# Altium PCB EV76C661_Motherboard.PcbDoc
Units mm, origin at the board's own origin, x right, y up, seen from the top; angles counter-clockwise.
Board outline 89 x 93 mm, 2 copper layers (Top Layer, Bottom Layer); 17 components, 26 nets, 152 pads, 0 vias.
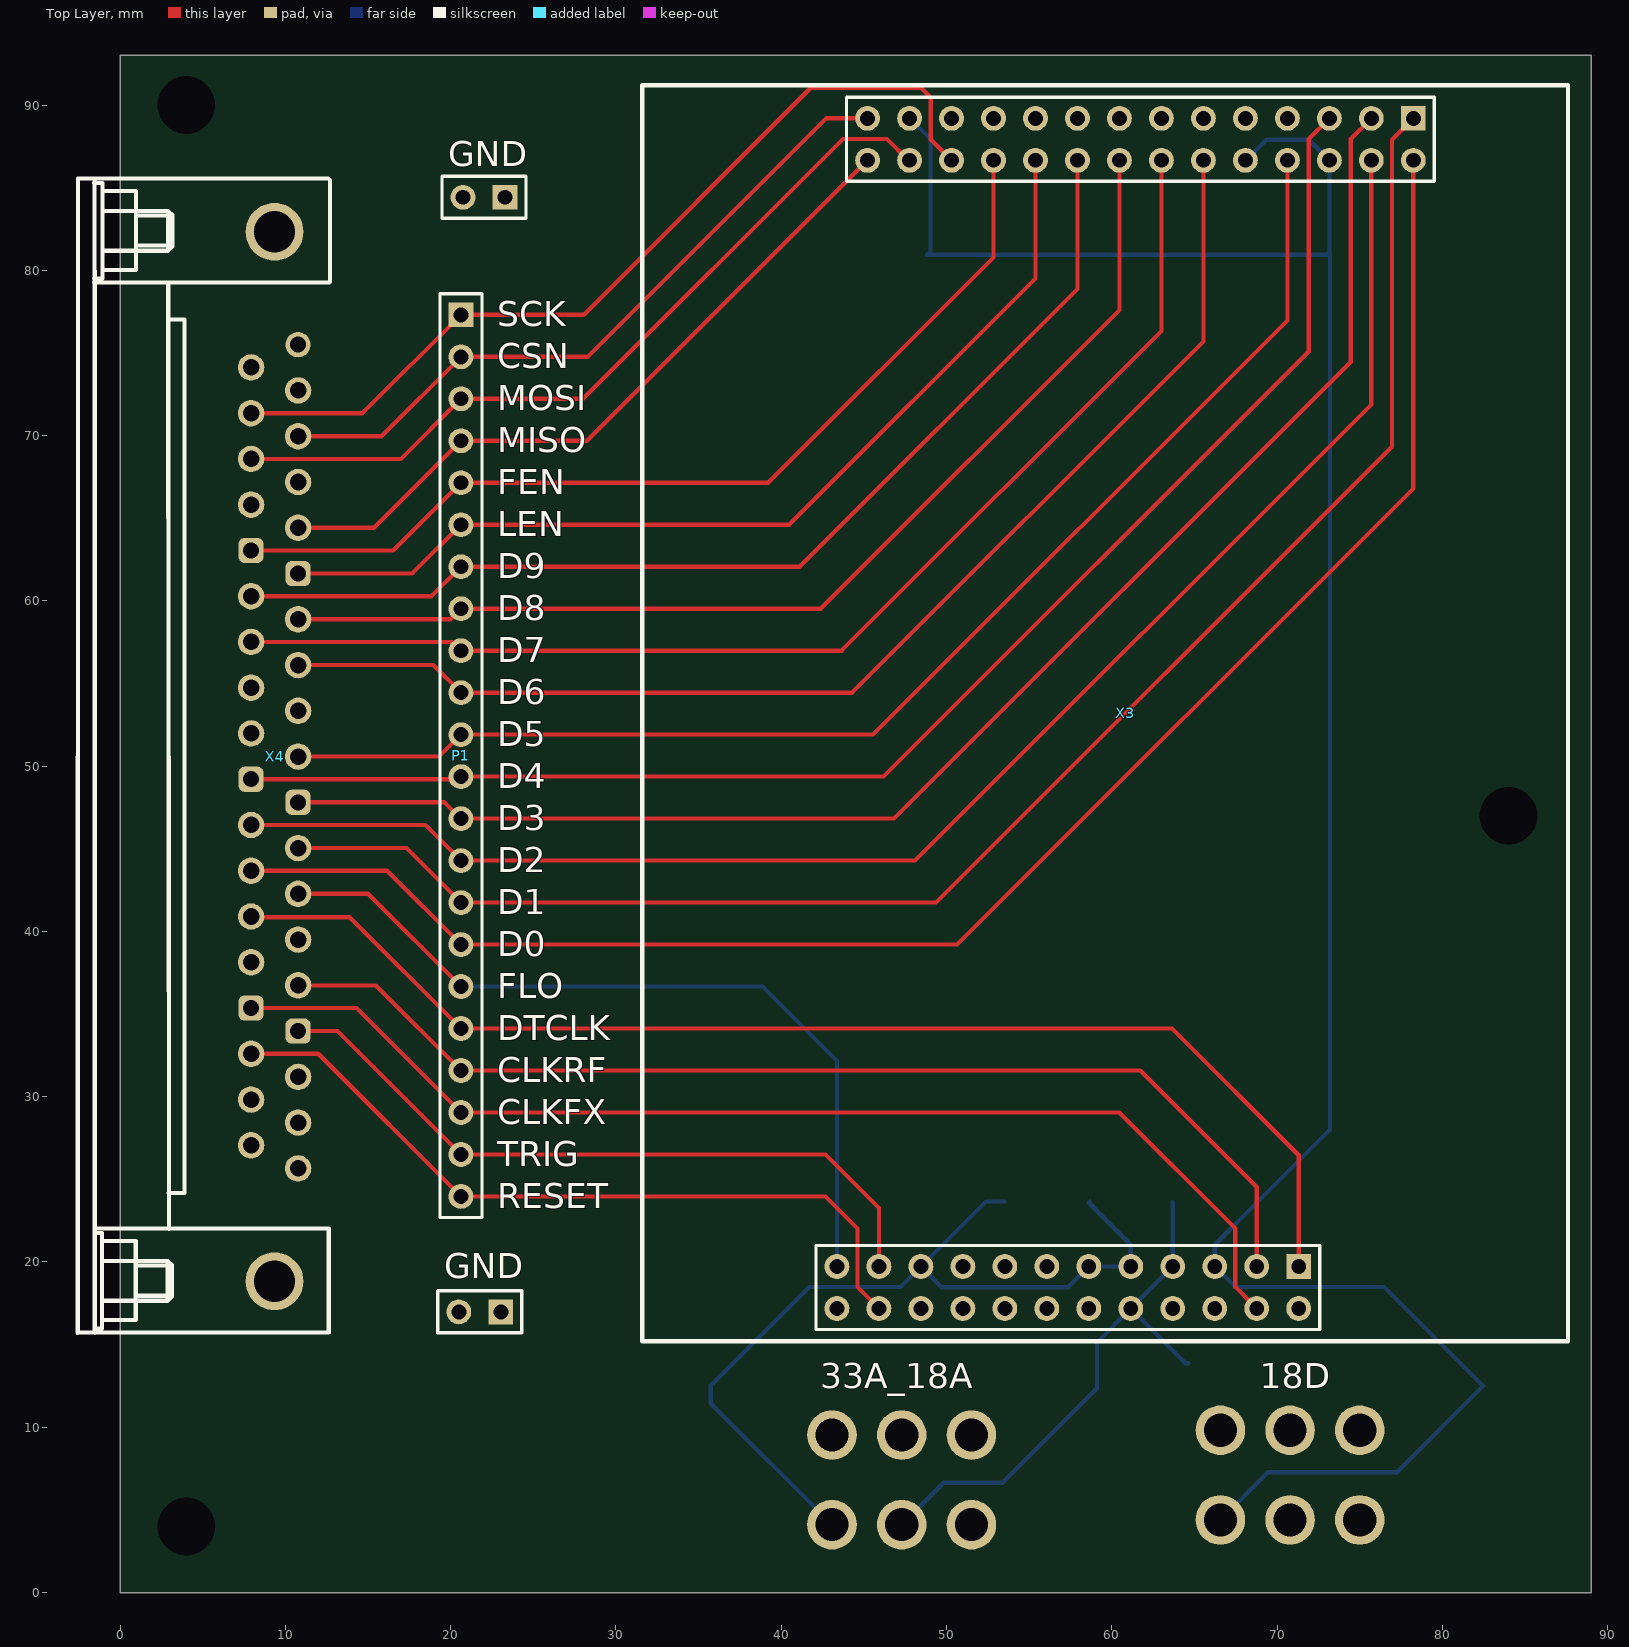
[diagram p0: Top Layer view]
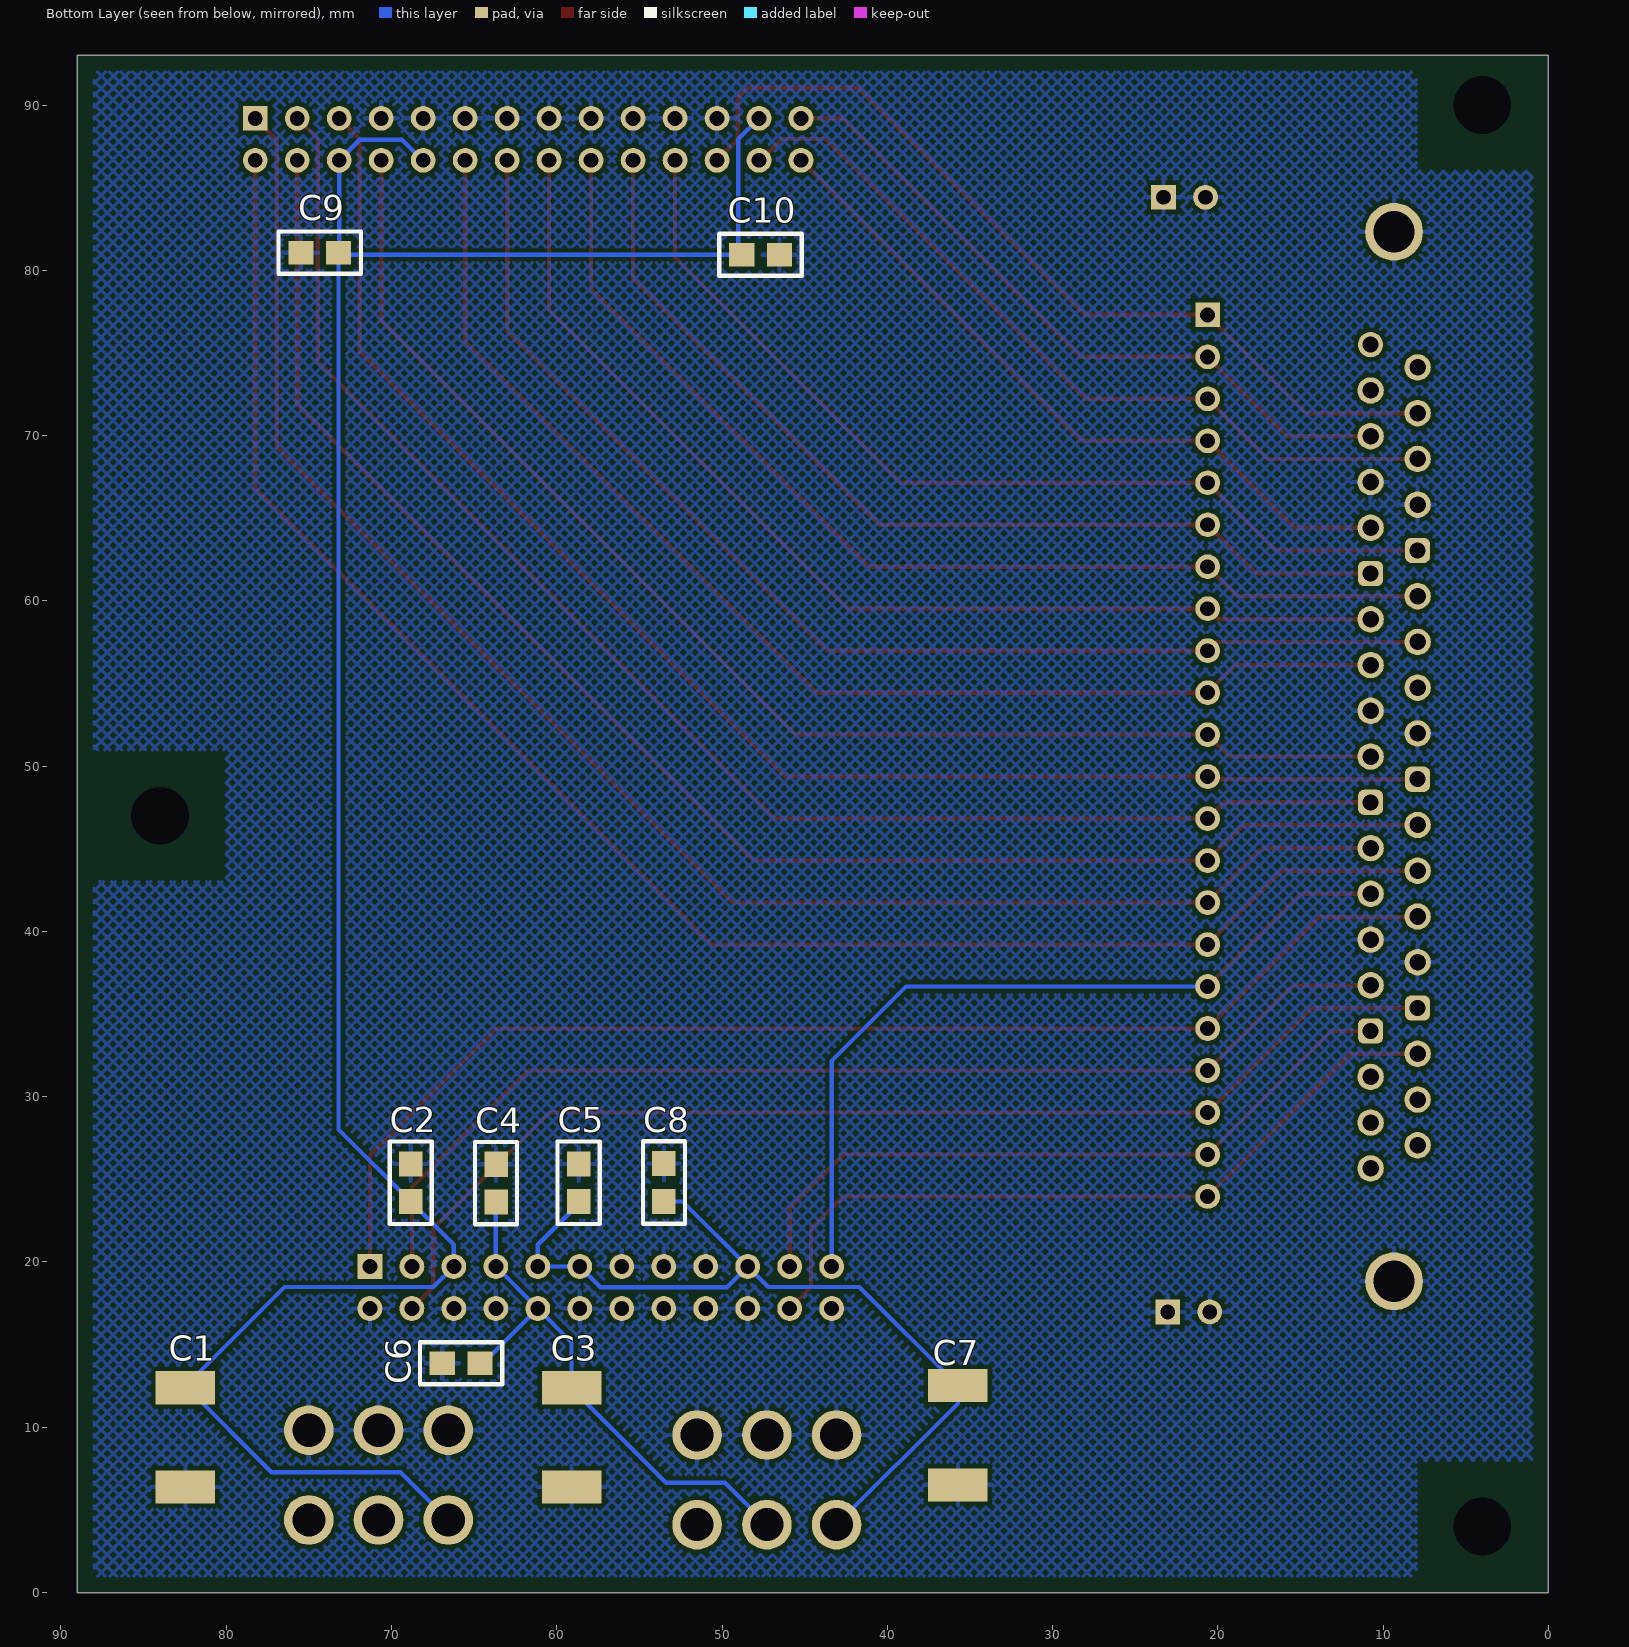
[diagram p1: Bottom Layer view, seen from below]

## Layer stack, top to bottom
Top Solder: solder mask 0.0102, Solder Resist, Dk 3.5
Top Layer: signal copper 0.0356
Dielectric 1: dielectric 0.32, FR-4, Dk 4.8
Bottom Layer: signal copper 0.0356
Bottom Solder: solder mask 0.0102, Solder Resist, Dk 3.5

## Board outline
0,0 89,0 89,93 0,93
cut-out: 89.199,93.006
cut-out: 89.199,93.006

## Design rules (kind name [scope] priority, off if disabled: settings)
Clearance [All] p1: gap=0.254 ignorepadtopadclearanceinfootprint=FALSE except(0: Arc-Hole Track-Hole SMDPad-Hole THPad-Hole Via-Hole Fill-Hole Poly-Hole Region-Hole Text-Hole)
PolygonConnect [All] p1: connectstyle=Relief reliefconductorwidth=0.254 reliefentries=4 polygonreliefangle="90 Angle" airgapwidth=0.254
RoutingVias [All] p1: holewidth=0.711 width=1.27 viastyle="Through Hole" minholewidth=0.711 minwidth=1.27 maxholewidth=0.711 maxwidth=1.27
SolderMaskExpansion [All] p1: expansion=0.102
Width [All] p1: maxlimit=0.254 minlimit=0.125 preferedwidth=0.254
30 further rules are at their usual default settings.

## Components (designator, comment, footprint, x,y, rotation, side; value= is the part's Value field where it differs from the comment)
18D "POWER" POWER 70.784,12.019 r180 top (schematic designator X2)
33A_18A "POWER" POWER 47.289,11.726 r180 top (schematic designator X1)
C1 "10uF" Cap_BIG 80.563,13.484 r0 bottom
C2 "100nF" CAP_SMALL 67.564,22.287 r90 bottom
C3 "10uF" Cap_BIG 57.195,13.484 r0 bottom
C4 "100nF" CAP_SMALL 62.402,22.267 r90 bottom
C5 "100nF" CAP_SMALL 59.944,27.301 r270 bottom
C6 "100nF" CAP_SMALL 63.279,15.142 r0 bottom
C7 "10uF" Cap_BIG 33.827,13.611 r0 bottom
C8 "100nF" CAP_SMALL 52.242,22.3 r90 bottom
C9 "100nF" CAP_SMALL 76.847,79.798 r180 bottom
C10 "100nF" CAP_SMALL 45.163,82.211 r0 bottom
GND "Header 2" HDR1X2 23.032,16.981 r180 top (schematic designator P2)
GND "Header 2" HDR1X2 23.286,84.418 r180 top (schematic designator P3)
P1 "Header 22" HDR1X22 20.619,77.306 r270 top
X3 "EV76_MEZ" EV76C661_MEZONINE 71.307,17.187 r90 top
X4 "CHEAP_CON_37_FEMALE" CHEAP_CONN_FEMALE 9.341,18.831 r90 top

## Footprints (in the part's own frame and the unit in brackets; to place one, negate y for a bottom-side part, rotate by r counter-clockwise, add the part's x,y. Pads: shape width x height; smd on the part's side, far side on the other; paste and mask are expansions set on the pad)
Cap_BIG [mm] "FROM_MAX"
  rect 3.6x2 smd: 1(1.905,7.092) 2(1.905,1.092)
  body extent 0,-0.01 3.81,8.19, height 2.54
CAP_SMALL [mil] "FROM_MAX"
  rect 60x55.98 smd: 1(53.71,50) 2(143.71,50)
  silkscreen extent 1,0 197,100, body extent 20,18 178,82, height 100
CHEAP_CONN_FEMALE [mm] "CHEAP_CONN_FEMALE"
  round 1.6 hole 1: 1(6.833,-1.422) 2(9.601,-1.422) 3(12.37,-1.422) 5(17.907,-1.422) 6(20.676,-1.422) 7(23.444,-1.422) 8(26.213,-1.422) 10(31.75,-1.422) 11(34.519,-1.422) 12(37.287,-1.422) 13(40.056,-1.422) 15(45.593,-1.422) 16(48.362,-1.422) 17(51.13,-1.422) 18(53.899,-1.422) 20(8.23,1.422) 21(10.998,1.422) 22(13.767,1.422) 24(19.304,1.422) 25(22.073,1.422) 26(24.841,1.422) 27(27.61,1.422) 29(33.147,1.422) 30(35.916,1.422) 31(38.684,1.422) 32(41.453,1.422) 34(46.99,1.422) 35(49.759,1.422) 36(52.527,1.422) 37(55.296,1.422)
  rrect50% 1.524x1.524 hole 0.965: 4(15.138,-1.422) 9(28.981,-1.422) 14(42.824,-1.422) 23(16.535,1.422) 28(30.378,1.422) 33(44.221,1.422)
  round 1.524 hole 0.965: 19(56.667,-1.422)
  round 3.5 hole 2.5: 38(0,0) 39(63.5,0)
  silkscreen extent -3.11,-3.36 66.72,11.92
EV76C661_MEZONINE [mm]
  rect 1.5x1.5 hole 0.9: 1(2.54,0) 25(72.009,-6.934)
  round 1.5 hole 0.9: 2(0,0) 3(2.54,2.54) 4(0,2.54) 5(2.54,5.08) 6(0,5.08) 7(2.54,7.62) 8(0,7.62) 9(2.54,10.16) 10(0,10.16) 11(2.54,12.7) 12(0,12.7) 13(2.54,15.24) 14(0,15.24) 15(2.54,17.78) 16(0,17.78) 17(2.54,20.32) 18(0,20.32) 19(2.54,22.86) 20(0,22.86) 21(2.54,25.4) 22(0,25.4) 23(2.54,27.94) 24(0,27.94) 26(72.009,-4.394) 27(72.009,-1.854) 28(72.009,0.686) 29(72.009,3.226) 30(72.009,5.766) 31(72.009,8.306) 32(72.009,10.846) 33(72.009,13.386) 34(72.009,15.926) 35(72.009,18.466) 36(72.009,21.006) 37(72.009,23.546) 38(72.009,26.086) 39(69.469,-6.934) 40(69.469,-4.394) 41(69.469,-1.854) 42(69.469,0.686) 43(69.469,3.226) 44(69.469,5.766) 45(69.469,8.306) 46(69.469,10.846) 47(69.469,13.386) 48(69.469,15.926) 49(69.469,18.466) 50(69.469,21.006) 51(69.469,23.546) 52(69.469,26.086)
  silkscreen extent -1.99,-16.28 74.01,39.72
HDR1X2 [mm] "Connector; Header; 2 Position"
  rect 1.5x1.5 hole 0.9: 1(0,0)
  round 1.5 hole 0.9: 2(2.54,0)
  silkscreen extent -1.27,-1.27 3.81,1.27
HDR1X22 [mm] "Connector; Header; 22 Position"
  rect 1.5x1.5 hole 0.9: 1(0,0)
  round 1.5 hole 0.9: 2(2.54,0) 3(5.08,0) 4(7.62,0) 5(10.16,0) 6(12.7,0) 7(15.24,0) 8(17.78,0) 9(20.32,0) 10(22.86,0) 11(25.4,0) 12(27.94,0) 13(30.48,0) 14(33.02,0) 15(35.56,0) 16(38.1,0) 17(40.64,0) 18(43.18,0) 19(45.72,0) 20(48.26,0) 21(50.8,0) 22(53.34,0)
  silkscreen extent -1.27,-1.27 54.61,1.27
POWER [mm] "POWER"
  round 3 hole 2: 1(4.217,7.62) 2(0,7.62) 3(-4.217,7.62) 4(4.217,2.198) 5(0,2.198) 6(-4.217,2.198)

## Part data
C1 C3 C7: library part CAP_BIG
C2 C4 C5 C6 C8 C9 C10: library part CAP_SMALL
GND GND: "Header, 2-Pin", LatestRevisionDate=17-Jul-2002, LatestRevisionNote="Re-released for DXP Platform.", Publisher="Altium Limited"
P1: "Header, 22-Pin", LatestRevisionDate=17-Jul-2002, LatestRevisionNote="Re-released for DXP Platform.", Publisher="Altium Limited"
X3: library part EV76C661_MEZ

## Free pads (board coordinates)
  round 1.524 hole 3.5 unplated: 0(4,4) 0(4,90) 0(84,47)

## Nets (pads, with @x,y where several pads share a name; then routed paths per layer and width w, separated by ;. In a path a pad name is that pad's centre, name@x,y a point inside that pad or via, vN(x,y) a via of type N, cw(c..) or ccw(c..) an arc to the next point about the centre after c; other vN are vias at no path point)
CLKFIX: P1.20 X3.4 X4.23 | length 70.5
  Top Layer w0.254: X4.23 14.299,35.366 P1.20 60.449,29.046 67.472,22.023 67.472,18.482 X3.4
CLKREF: P1.19 X3.3 X4.5 | length 67.9
  Top Layer w0.254: X4.5 15.467,36.738 P1.19 61.719,31.586 68.767,24.538 X3.3
CSN: P1.2 X3.38 X4.17 | length 42.4
  Top Layer w0.254: X4.17 15.814,69.961 P1.2 28.287,74.766 42.717,89.196 X3.38
D0: P1.16 X3.39 X4.26 | length 103.5
  Top Layer w0.254: X4.26 16.153,43.672 P1.16 50.639,39.206 78.242,66.809 X3.39
D1: P1.15 X3.25 X4.8 | length 99.4
  Top Layer w0.254: X4.8 17.322,45.043 P1.15 49.369,41.746 76.946,69.323 76.946,87.901 X3.25
D2: P1.14 X3.40 X4.27 | length 94.9
  Top Layer w0.254: X4.27 18.465,46.44 P1.14 48.099,44.286 75.702,71.889 X3.40
D3: P1.13 X3.26 X4.9 | length 90.8
  Top Layer w0.254: X4.9 19.633,47.812 P1.13 46.829,46.826 74.457,74.454 74.457,87.951 X3.26
D4: P1.12 X3.27 X4.28 | length 89.6
  Top Layer w0.254: X4.28@8.076,49.366 X4.28 20.462,49.209 P1.12 46.194,49.366 71.917,75.089 71.917,87.951 X3.27
D5: P1.11 X3.42 X4.10 | length 80.5
  Top Layer w0.254: X4.10 19.294,50.581 P1.11 45.559,51.906 70.622,76.969 X3.42
D6: P1.10 X3.44 X4.12 | length 75.2
  Top Layer w0.254: X4.12 18.947,56.118 P1.10 44.289,54.446 65.542,75.699 X3.44
D7: P1.9 X3.45 X4.31 | length 73.6
  Top Layer w0.254: X4.31 20.09,57.515 P1.9 43.654,56.986 63.002,76.334 X3.45
D8: P1.8 X3.46 X4.13 | length 66.5
  Top Layer w0.254: X4.13 19.979,58.886 P1.8 42.384,59.526 60.462,77.604 X3.46
D9: P1.7 X3.47 X4.32 | length 65.5
  Top Layer w0.254: X4.32 18.836,60.283 P1.7 41.114,62.066 57.922,78.874 X3.47
DATACLK: P1.18 X3.1 X4.25 | length 76.1
  Top Layer w0.254: X4.25 7.965,40.857 13.888,40.857 P1.18 63.639,34.126 71.307,26.458 X3.1
FEN: P1.5 X3.49 X4.33 | length 58.1
  Top Layer w0.254: X4.33 16.525,63.052 P1.5 39.209,67.146 52.842,80.779 X3.49
FLO: P1.17 X3.23 X4.7 | length 49.2
  Top Layer w0.254: X4.7 15.01,42.275 P1.17
  Bottom Layer w0.254: P1.17 38.859,36.666 43.367,32.158 X3.23
GND: 18D.4 18D.5 18D.6 33A_18A.4 33A_18A.5 33A_18A.6 C1.1 C2.2 C3.1 C4.2 C5.1 C6.2 C7.1 C8.2 C9.1 C10.1 GND.1 GND.2 X3.2 X3.6 X3.8 X3.12 X3.13 X3.14 X3.15 X3.16 X3.17 X3.18 X3.20 X3.24 X3.28 X3.29 X3.30 X3.31 X3.32 X3.33 X3.34 X3.35 X3.36 X4.6 X4.11 X4.16 X4.24 X4.29 X4.34 X4.38 X4.39 | length 0
  Bottom Layer w0.254: C4.2@63.639,25.95 C4.2
LEN: P1.6 X3.48 X4.14 | length 59.2
  Top Layer w0.254: X4.14 17.668,61.655 P1.6 40.479,64.606 55.382,79.509 X3.48
MISO: P1.4 X3.52 X4.15 | length 44
  Top Layer w0.254: X4.15 15.357,64.424 P1.4 28.252,69.686 X3.52 X3.52@44.841,86.656
MOSI: P1.3 X3.51 X4.35 | length 48.4
  Top Layer w0.254: X4.35 16.982,68.589 P1.3 28.008,72.226 43.733,87.951 46.39,87.951 47.685,86.656 X3.51
RESET: P1.22 X3.22 X4.22 | length 46.4
  Top Layer w0.254: X4.22 11.988,32.597 P1.22 42.669,23.966 44.612,22.023 44.612,18.482 X3.22
SCK: P1.1 X3.50 X4.36 | length 53.8
  Top Layer w0.254: X4.36 14.671,71.358 P1.1 28.047,77.306 41.784,91.043 48.445,91.043 49.047,90.441 49.047,87.91 X3.50
TRIG: P1.21 X3.21 X4.4 | length 43.1
  Top Layer w0.254: X4.4 13.156,33.969 P1.21 42.669,26.506 45.907,23.268 X3.21
VDD18A: 33A_18A.2 C3.2 C4.1 C6.1 X3.7 X3.10 | length 33.3
  Bottom Layer w0.254: 33A_18A.2 49.829,6.646 53.385,6.646 59.1,12.361 59.1,15.14 X3.10 ; C4.1 63.687,23.616 X3.7 X3.10 ; C6.1 64.462,13.872 X3.10
VDD18D: 18D.1 C1.2 C2.1 C9.2 C10.2 X3.5 X3.37 X3.41 X3.43 | length 147.7
  Bottom Layer w0.254: X3.37 49.022,87.936 49.022,81.15 C10.2 72.999,80.941 C9.2@73.162,81.103 ; 18D.1 69.449,7.281 77.261,7.281 82.468,12.488 76.474,18.482 67.472,18.482 X3.5 66.227,21.044 C2.1 73.197,28.014 C9.2 C9.2@73.162,81.103 ; X3.43 68.117,86.656 69.362,87.901 71.917,87.901 X3.41 C9.2@73.162,81.103
VDD33A: 33A_18A.1 C5.2 C7.2 C8.1 X3.9 X3.11 X3.19 | length 52.6
  Bottom Layer w0.254: 33A_18A.1 35.732,11.445 C7.2 41.695,18.482 47.203,18.482 X3.19 ; C8.1 52.384,23.664 X3.19 ; C5.2 58.607,23.584 61.147,21.044 X3.9 X3.11 57.35,18.469 49.705,18.469 X3.19
pads on no net: 18D.2 18D.3 33A_18A.3 X4.1 X4.2 X4.3 X4.18 X4.19 X4.20 X4.21 X4.30 X4.37

## Polygon pours and split planes (outlines as drawn)
no net on Top Layer (solid, pour order 0): 0,-1
GND on Bottom Layer "GND_L02_P060" (hatched 45Degree grid 0.508 track 0.203, remove dead copper, pour order 60): -11,15
GND on Bottom Layer "GND_L02_P058" (hatched 45Degree grid 0.508 track 0.203, remove dead copper, pour order 58): 8,8 1,8 1,86 8,86 8,92 88,92 88,51 80,51 80,43 88,43 88,1 8,1
GND on Bottom Layer "GND_L02_P056" (hatched 45Degree grid 0.508 track 0.203, remove dead copper, pour order 56): 9,92
GND on Bottom Layer "GND_L02_P042" (hatched 45Degree grid 0.508 track 0.203, remove dead copper, pour order 42): 1,92
GND on Bottom Layer "GND_L02_P040" (hatched 45Degree grid 0.508 track 0.203, remove dead copper, pour order 40): 1,92
GND on Bottom Layer "GND_L02_P036" (hatched 45Degree grid 0.508 track 0.203, remove dead copper, pour order 36): -1,88.25
GND on Bottom Layer "GND_L02_P034" (hatched 45Degree grid 0.508 track 0.203, remove dead copper, pour order 34): -12.5,78.5
GND on Bottom Layer "GND_L02_P028" (hatched 45Degree grid 0.508 track 0.203, remove dead copper, pour order 28): 1.905,91.44
no net on Bottom Layer (solid, pour order 2): 0,94

## Silkscreen, mask and mechanical layers (free items; w line width, h text height)
Top Overlay:
  text "SCK" at 22.829,76.62 h1.52
  text "CSN" at 22.829,74.079 h1.52
  text "MOSI" at 22.829,71.538 h1.52
  text "MISO" at 22.829,68.997 h1.52
  text "FEN" at 22.829,66.455 h1.52
  text "LEN" at 22.829,63.914 h1.52
  text "D9" at 22.829,61.373 h1.52
  text "D8" at 22.829,58.832 h1.52
  text "D7" at 22.829,56.29 h1.52
  text "D6" at 22.829,53.749 h1.52
  text "D5" at 22.829,51.208 h1.52
  text "D4" at 22.829,48.667 h1.52
  text "D3" at 22.829,46.126 h1.52
  text "D2" at 22.829,43.584 h1.52
  text "D1" at 22.829,41.043 h1.52
  text "D0" at 22.829,38.502 h1.52
  text "FLO" at 22.829,35.961 h1.52
  text "DTCLK" at 22.829,33.42 h1.52
  text "CLKRF" at 22.829,30.878 h1.52
  text "CLKFX" at 22.829,28.337 h1.52
  text "TRIG" at 22.829,25.796 h1.52
  text "RESET" at 22.829,23.255 h1.52
Mechanical 1:
  the board outline again, w0.5